# Altium PCB PCB1.PcbDoc
Units mil, origin at the board's own origin, x right, y up, seen from the top; angles counter-clockwise.
Board outline 8335 x 5613.82 mil, 2 copper layers (Top Layer, Bottom Layer); 104 components, 11 nets, 284 pads, 0 vias.
Unrouted connection lines stored in the file: 1.
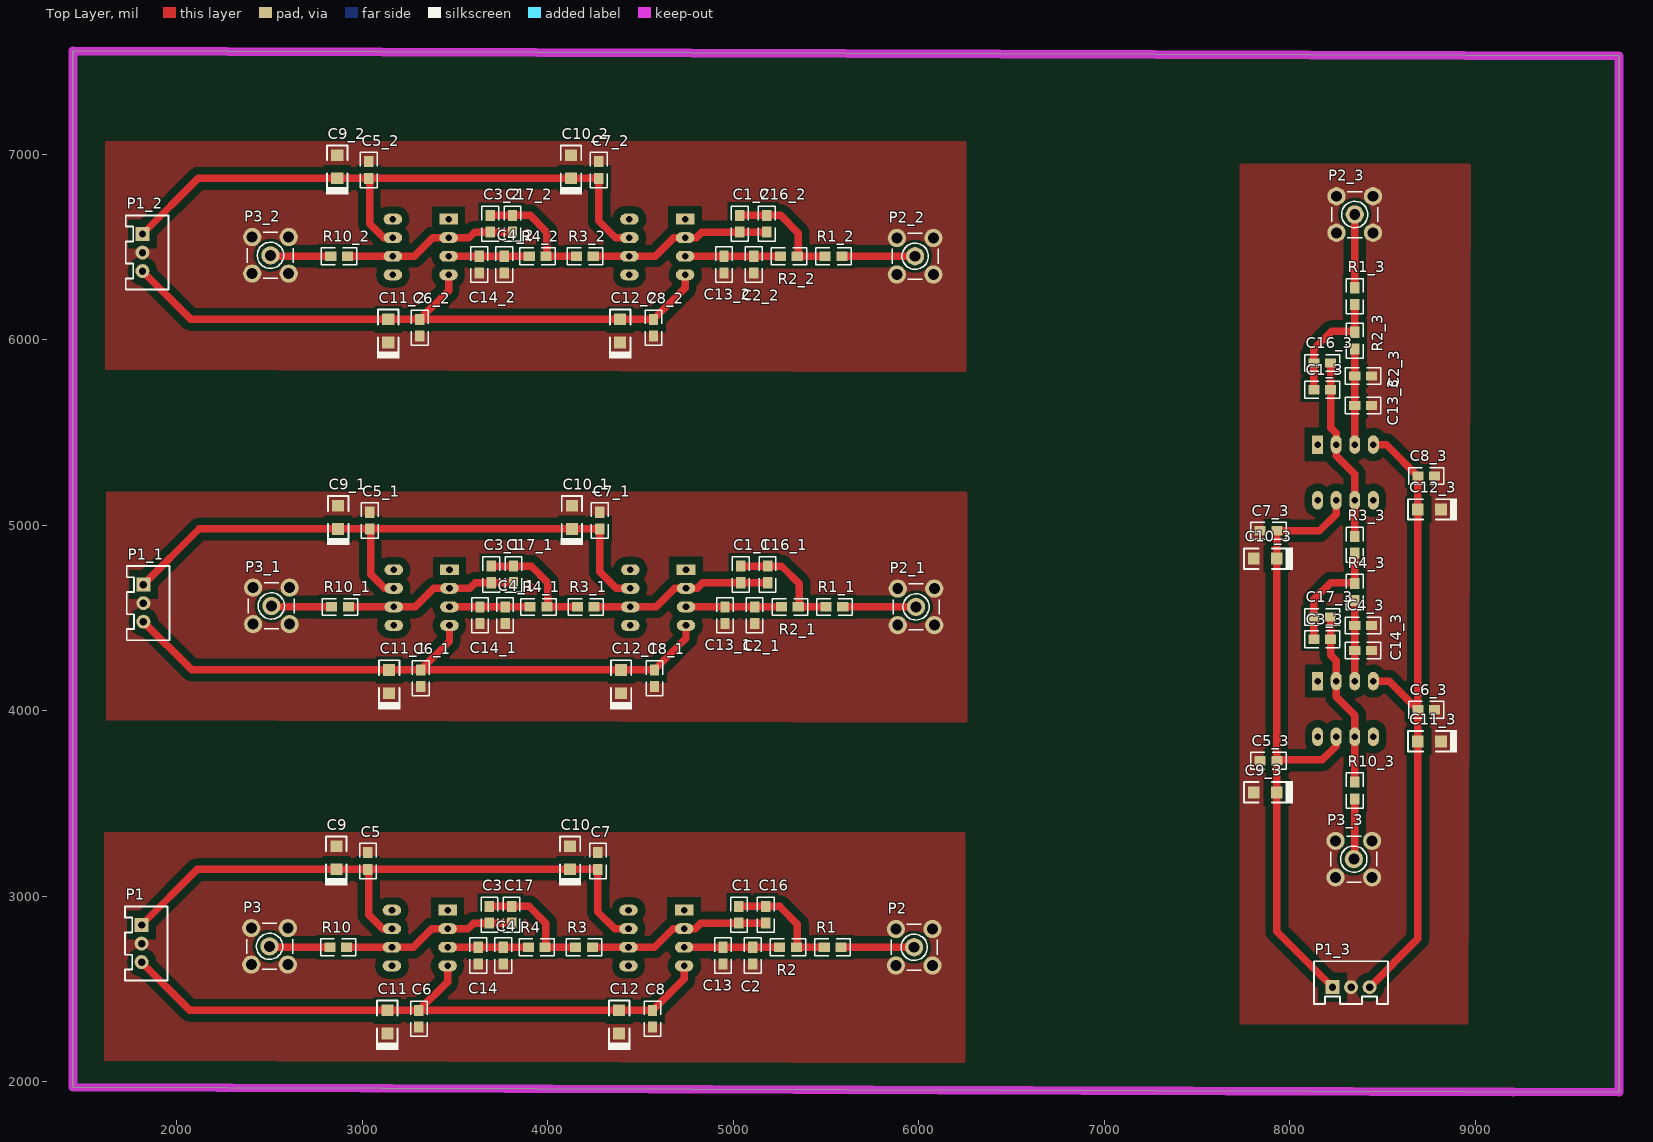
[diagram p0: Top Layer view]
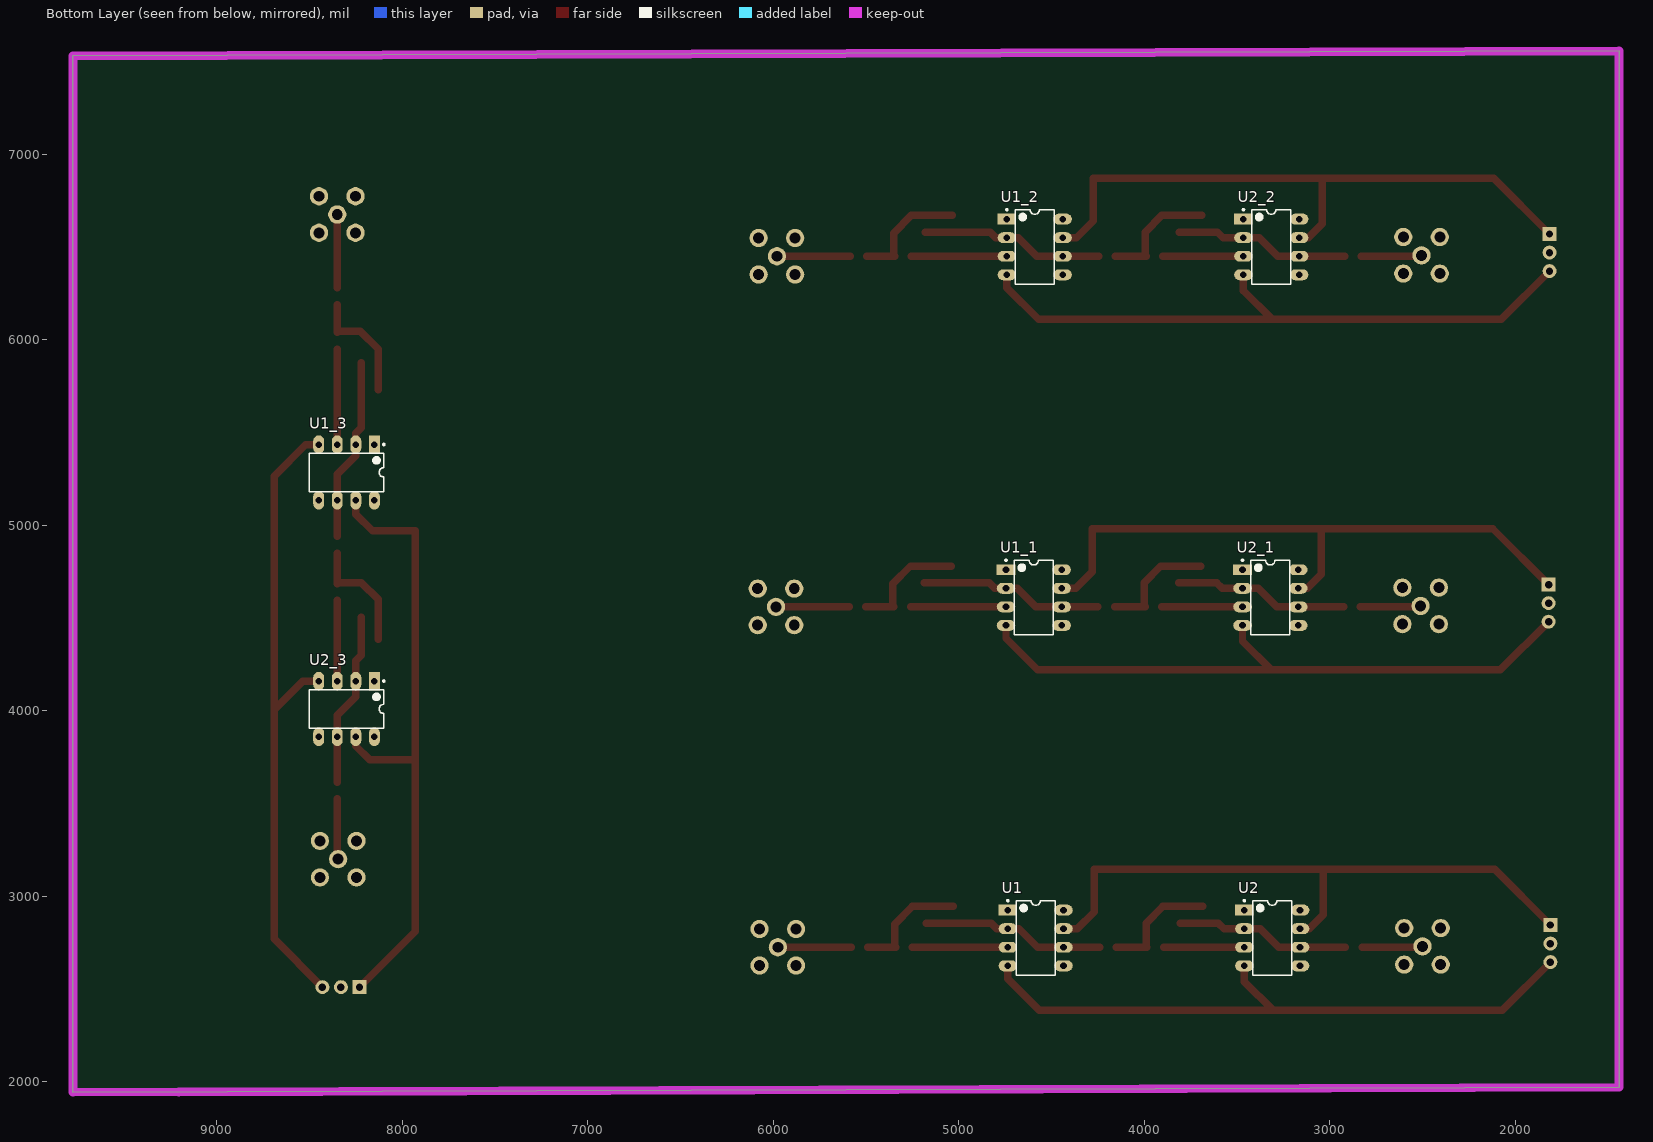
[diagram p1: Bottom Layer view, seen from below]

## Layer stack, top to bottom
Top Solder: solder mask 0.4, Solder Resist, Dk 3.5
Top Layer: signal copper 1.4
Dielectric 1: dielectric 12.6, FR-4, Dk 4.8
Bottom Layer: signal copper 1.4
Bottom Solder: solder mask 0.4, Solder Resist, Dk 3.5

## Board outline
1440,1970 1440,7556.99 9775,7530.15 9775,1943.16

## Design rules (kind name [scope] priority, off if disabled: settings)
Clearance [All] p1: gap=10 except(40: Arc-Fill Arc-Poly Track-Fill Track-Poly SMDPad-Fill SMDPad-Poly THPad-Fill THPad-Poly Via-Fill Via-Poly Fill-Fill Fill-Poly Poly-Poly)
PlaneConnect [All] p1: planeconnectstyle=Direct reliefexpansion=20 reliefentries=4 reliefconductorwidth=10 reliefairgap=10
PolygonConnect [All] p1: connectstyle=Direct reliefconductorwidth=10 reliefentries=4 polygonreliefangle="90 Angle" airgapwidth=10
RoutingVias [All] p1: holewidth=28 width=50 viastyle="Through Hole" minholewidth=28 minwidth=50 maxholewidth=28 maxwidth=50
SolderMaskExpansion [All] p1: expansion=4
Width [All] p1: maxlimit=100 minlimit=10 preferedwidth=10
29 further rules are at their usual default settings.

## Components (designator, comment, footprint, x,y, rotation, side; value= is the part's Value field where it differs from the comment)
C1 "0.1uf" 0805 5030,2855 r90 top
C1_1 "0.1uf" 0805 5040,4690 r90 top (schematic designator C1)
C1_2 "0.1uf" 0805 5035,6580 r90 top (schematic designator C1)
C1_3 "0.1uf" 0805 8220,5730 r180 top (schematic designator C1)
C2 "0.1uf" 0805 5105,2725 r270 top
C2_1 "0.1uf" 0805 5115,4560 r270 top (schematic designator C2)
C2_2 "0.1uf" 0805 5110,6450 r270 top (schematic designator C2)
C2_3 "0.1uf" 0805 8350,5805 r0 top (schematic designator C2)
C3 "0.1uf" 0805 3685,2945 r270 top
C3_1 "0.1uf" 0805 3695,4780 r270 top (schematic designator C3)
C3_2 "0.1uf" 0805 3690,6670 r270 top (schematic designator C3)
C3_3 "0.1uf" 0805 8130,4385 r0 top (schematic designator C3)
C4 "0.1uf" 0805 3760,2635 r90 top
C4_1 "0.1uf" 0805 3770,4470 r90 top (schematic designator C4)
C4_2 "0.1uf" 0805 3765,6360 r90 top (schematic designator C4)
C4_3 "0.1uf" 0805 8440,4460 r180 top (schematic designator C4)
C5 "0.1uf" 0805 3030,3145 r90 top
C5_1 "0.1uf" 0805 3040,4980 r90 top (schematic designator C5)
C5_2 "0.1uf" 0805 3035,6870 r90 top (schematic designator C5)
C5_3 "0.1uf" 0805 7930,3730 r180 top (schematic designator C5)
C6 "0.1uf" 0805 3305,2385 r270 top
C6_1 "0.1uf" 0805 3315,4220 r270 top (schematic designator C6)
C6_2 "0.1uf" 0805 3310,6110 r270 top (schematic designator C6)
C6_3 "0.1uf" 0805 8690,4005 r0 top (schematic designator C6)
C7 "0.1uf" 0805 4270,3145 r90 top
C7_1 "0.1uf" 0805 4280,4980 r90 top (schematic designator C7)
C7_2 "0.1uf" 0805 4275,6870 r90 top (schematic designator C7)
C7_3 "0.1uf" 0805 7930,4970 r180 top (schematic designator C7)
C8 "0.1uf" 0805 4565,2385 r270 top
C8_1 "0.1uf" 0805 4575,4220 r270 top (schematic designator C8)
C8_2 "0.1uf" 0805 4570,6110 r270 top (schematic designator C8)
C8_3 "0.1uf" 0805 8690,5265 r0 top (schematic designator C8)
C9 "Cap" 3216C-TYPE_A 2860,3145 r270 top
C9_1 "Cap" 3216C-TYPE_A 2870,4980 r270 top (schematic designator C9)
C9_2 "Cap" 3216C-TYPE_A 2865,6870 r270 top (schematic designator C9)
C9_3 "Cap" 3216C-TYPE_A 7930,3560 r0 top (schematic designator C9)
C10 "Cap" 3216C-TYPE_A 4120,3145 r270 top
C10_1 "Cap" 3216C-TYPE_A 4130,4980 r270 top (schematic designator C10)
C10_2 "Cap" 3216C-TYPE_A 4125,6870 r270 top (schematic designator C10)
C10_3 "Cap" 3216C-TYPE_A 7930,4820 r0 top (schematic designator C10)
C11 "Cap" 3216C-TYPE_A 3135,2260 r270 top
C11_1 "Cap" 3216C-TYPE_A 3145,4095 r270 top (schematic designator C11)
C11_2 "Cap" 3216C-TYPE_A 3140,5985 r270 top (schematic designator C11)
C11_3 "Cap" 3216C-TYPE_A 8815,3835 r0 top (schematic designator C11)
C12 "Cap" 3216C-TYPE_A 4385,2260 r270 top
C12_1 "Cap" 3216C-TYPE_A 4395,4095 r270 top (schematic designator C12)
C12_2 "Cap" 3216C-TYPE_A 4390,5985 r270 top (schematic designator C12)
C12_3 "Cap" 3216C-TYPE_A 8815,5085 r0 top (schematic designator C12)
C13 "0.1uf" 0805 4945,2635 r90 top
C13_1 "0.1uf" 0805 4955,4470 r90 top (schematic designator C13)
C13_2 "0.1uf" 0805 4950,6360 r90 top (schematic designator C13)
C13_3 "0.1uf" 0805 8440,5645 r180 top (schematic designator C13)
C14 "0.1uf" 0805 3625,2635 r90 top
C14_1 "0.1uf" 0805 3635,4470 r90 top (schematic designator C14)
C14_2 "0.1uf" 0805 3630,6360 r90 top (schematic designator C14)
C14_3 "0.1uf" 0805 8440,4325 r180 top (schematic designator C14)
C16 "0.1uf" 0805 5175,2855 r90 top
C16_1 "0.1uf" 0805 5185,4690 r90 top (schematic designator C16)
C16_2 "0.1uf" 0805 5180,6580 r90 top (schematic designator C16)
C16_3 "0.1uf" 0805 8220,5875 r180 top (schematic designator C16)
C17 "0.1uf" 0805 3805,2855 r90 top
C17_1 "0.1uf" 0805 3815,4690 r90 top (schematic designator C17)
C17_2 "0.1uf" 0805 3810,6580 r90 top (schematic designator C17)
C17_3 "0.1uf" 0805 8220,4505 r180 top (schematic designator C17)
P1 "XH2.54-3p" XH2.54-3p 1810,2845 r270 top
P1_1 "XH2.54-3p" XH2.54-3p 1820,4680 r270 top (schematic designator P1)
P1_2 "XH2.54-3p" XH2.54-3p 1815,6570 r270 top (schematic designator P1)
P1_3 "XH2.54-3p" XH2.54-3p 8230,2510 r0 top (schematic designator P1)
P2 "SMB" SMB_V-RJ45 5975,2725 r0 top
P2_1 "SMB" SMB_V-RJ45 5985,4560 r0 top (schematic designator P2)
P2_2 "SMB" SMB_V-RJ45 5980,6450 r0 top (schematic designator P2)
P2_3 "SMB" SMB_V-RJ45 8350,6675 r90 top (schematic designator P2)
P3 "SMB" SMB_V-RJ45 2500,2730 r0 top
P3_1 "SMB" SMB_V-RJ45 2510,4565 r0 top (schematic designator P3)
P3_2 "SMB" SMB_V-RJ45 2505,6455 r0 top (schematic designator P3)
P3_3 "SMB" SMB_V-RJ45 8345,3200 r90 top (schematic designator P3)
R1 "0" 0805 5580,2725 r180 top
R1_1 "0" 0805 5590,4560 r180 top (schematic designator R1)
R1_2 "0" 0805 5585,6450 r180 top (schematic designator R1)
R1_3 "0" 0805 8350,6280 r270 top (schematic designator R1)
R2 "0" 0805 5340,2725 r180 top
R2_1 "0" 0805 5350,4560 r180 top (schematic designator R2)
R2_2 "0" 0805 5345,6450 r180 top (schematic designator R2)
R2_3 "0" 0805 8350,6040 r270 top (schematic designator R2)
R3 "0" 0805 4240,2725 r180 top
R3_1 "0" 0805 4250,4560 r180 top (schematic designator R3)
R3_2 "0" 0805 4245,6450 r180 top (schematic designator R3)
R3_3 "0" 0805 8350,4940 r270 top (schematic designator R3)
R4 "0" 0805 3985,2725 r180 top
R4_1 "0" 0805 3995,4560 r180 top (schematic designator R4)
R4_2 "0" 0805 3990,6450 r180 top (schematic designator R4)
R4_3 "0" 0805 8350,4685 r270 top (schematic designator R4)
R10 "0" 0805 2915,2725 r180 top
R10_1 "0" 0805 2925,4560 r180 top (schematic designator R10)
R10_2 "0" 0805 2920,6450 r180 top (schematic designator R10)
R10_3 "0" 0805 8350,3615 r270 top (schematic designator R10)
U1 "OP07" TI-JG8 4585,2775 r180 bottom
U1_1 "OP07" TI-JG8 4595,4610 r180 bottom (schematic designator U1)
U1_2 "OP07" TI-JG8 4590,6500 r180 bottom (schematic designator U1)
U1_3 "OP07" TI-JG8 8300,5285 r270 bottom (schematic designator U1)
U2 "OP07" TI-JG8 3310,2775 r180 bottom
U2_1 "OP07" TI-JG8 3320,4610 r180 bottom (schematic designator U2)
U2_2 "OP07" TI-JG8 3315,6500 r180 bottom (schematic designator U2)
U2_3 "OP07" TI-JG8 8300,4010 r270 bottom (schematic designator U2)

## Footprints (in the part's own frame and the unit in brackets; to place one, negate y for a bottom-side part, rotate by r counter-clockwise, add the part's x,y. Pads: shape width x height; smd on the part's side, far side on the other; paste and mask are expansions set on the pad)
0805 [mil]
  rect 60x50 smd: 1(0,0) 2(90,0)
  silkscreen extent -50,-45 140,45
3216C-TYPE_A [mm]
  rect 1.6x1.65 smd: 1(0,0) 2(-3.175,0)
  silkscreen extent -4.51,-1.54 2.22,1.52
SMB_V-RJ45 [mm] "Connector; SMB Straight"
  round 2.5 hole 1.5: 1(0,0) 2(-2.5,-2.5) 2(-2.5,2.5) 2(2.5,-2.5) 2(2.5,2.5)
  silkscreen extent -3.15,-3.15 3.15,3.15
TI-JG8 [mm] "DIP, 8-Leads, Body 10.15x7.1mm, Pitch 2.54mm"
  rect 2.54x1.5 hole 0.9: 1(-3.81,3.81)
  oval 2.54x1.5 hole 0.9: 2(-3.81,1.27) 3(-3.81,-1.27) 4(-3.81,-3.81) 5(3.81,-3.81) 6(3.81,-1.27) 7(3.81,1.27) 8(3.81,3.81)
  silkscreen extent -3.94,-5.1 2.65,5.23, body extent -3.95,-5.07 3.95,5.07, height 5.08
XH2.54-3p [mil]
  rect 75x75 hole 40: 1(0,0)
  round 75 hole 40: 2(100,0) 3(200,0)
  silkscreen extent -100,-90 300,140

## Part data
C1 C1_1 C1_2 C1_3 C2 C2_1 C2_2 C2_3 C3 C3_1 C3_2 C3_3 C4 C4_1 C4_2 C4_3: library part cap
C5 C5_1 C5_2 C5_3 C6 C6_1 C6_2 C6_3 C7 C7_1 C7_2 C7_3 C8 C8_1 C8_2 C8_3 C13 C13_1 C13_2 C13_3 C14 C14_1 C14_2 C14_3 C16 C16_1 C16_2 C16_3 C17 C17_1 C17_2 C17_3: library part Cap
C9 C9_1 C9_2 C9_3 C10 C10_1 C10_2 C10_3 C11 C11_1 C11_2 C11_3 C12 C12_1 C12_2 C12_3: library part "Tantalium Cap"
P2 P2_1 P2_2 P2_3 P3 P3_1 P3_2 P3_3: "SMB Straight Connector"
R1 R1_1 R1_2 R1_3 R2 R2_1 R2_2 R2_3 R3 R3_1 R3_2 R3_3 R4 R4_1 R4_2 R4_3 R10 R10_1 R10_2 R10_3: library part Res

## Nets (pads, with @x,y where several pads share a name; then routed paths per layer and width w, separated by ;. In a path a pad name is that pad's centre, name@x,y a point inside that pad or via, vN(x,y) a via of type N, cw(c..) or ccw(c..) an arc to the next point about the centre after c; other vN are vias at no path point)
5V: C5.1 C7.1 C9.1 C10.1 P1.1 U1.7 U2.7 | length 3412.6
  Top Layer w40: P1.1 2110,3145 C9.1 C5.1 ; U2.7 3110,2825 3035,2900 3035,3145 C10.1 C7.1 4270,2915 4360,2825 U1.7
-5V: C6.1 C8.1 C11.2 C12.2 P1.3 U1.4 U2.4 | length 3477.3
  Top Layer w40: P1.3 2070,2385 C11.2 C6.1 ; U2.4 3460,2540 C6.1 ; U1.4 4735,2555 C8.1 C12.2 C6.1
GND: C2.2 C4.1 C5.2 C6.2 C7.2 C8.2 C9.2 C10.2 C11.1 C12.1 C13.1 C14.1 P1.2 P2.2 P3.2
NetC1_1: C1.1 C16.1 R3.1 U1.2 U1.6 | length 988.8
  Top Layer w40: R3.1 U1.6 4575,2725 4675,2825 U1.2 4795,2825 4825,2855 C1.1 C16.1
NetC1_2: C1.2 C16.2 R1.2 R2.1 | length 631.4
  Top Layer w40: C1.2 C16.2 5250,2945 5345,2850 5345,2730 R2.1 R1.2
NetC2_1: C2.1 C13.2 R2.2 U1.3 | length 515
  Top Layer w40: U1.3 C13.2 C2.1 R2.2
NetC3_1: C3.1 C17.2 R3.2 R4.1 | length 639.4
  Top Layer w40: C3.1 C17.2 3900,2945 3990,2855 3990,2730 R4.1 R3.2
NetC3_2: C3.2 C17.1 R10.1 U2.2 U2.6 | length 943.8
  Top Layer w40: R10.1 U2.6 3275,2725 3375,2825 U2.2 3570,2825 3600,2855 C3.2 C17.1
NetC4_2: C4.2 C14.2 R4.2 U2.3 | length 435
  Top Layer w40: U2.3 C14.2 C4.2 R4.2
NetP2_1: P2.1 R1.1 | length 395
  Top Layer w40: R1.1 P2.1
NetP3_1: P3.1 R10.2 | length 327.1
  Top Layer w40: P3.1 2505,2725 R10.2
pads on no net: C1_1.1 C1_1.2 C1_2.1 C1_2.2 C1_3.1 C1_3.2 C2_1.1 C2_1.2 C2_2.1 C2_2.2 C2_3.1 C2_3.2 C3_1.1 C3_1.2 C3_2.1 C3_2.2 C3_3.1 C3_3.2 C4_1.1 C4_1.2 C4_2.1 C4_2.2 C4_3.1 C4_3.2 C5_1.1 C5_1.2 C5_2.1 C5_2.2 C5_3.1 C5_3.2 C6_1.1 C6_1.2 C6_2.1 C6_2.2 C6_3.1 C6_3.2 C7_1.1 C7_1.2 C7_2.1 C7_2.2 C7_3.1 C7_3.2 C8_1.1 C8_1.2 C8_2.1 C8_2.2 C8_3.1 C8_3.2 C9_1.1 C9_1.2 C9_2.1 C9_2.2 C9_3.1 C9_3.2 C10_1.1 C10_1.2 C10_2.1 C10_2.2 C10_3.1 C10_3.2 C11_1.1 C11_1.2 C11_2.1 C11_2.2 C11_3.1 C11_3.2 C12_1.1 C12_1.2 C12_2.1 C12_2.2 C12_3.1 C12_3.2 C13_1.1 C13_1.2 C13_2.1 C13_2.2 C13_3.1 C13_3.2 C14_1.1 C14_1.2 C14_2.1 C14_2.2 C14_3.1 C14_3.2 C16_1.1 C16_1.2 C16_2.1 C16_2.2 C16_3.1 C16_3.2 C17_1.1 C17_1.2 C17_2.1 C17_2.2 C17_3.1 C17_3.2 P1_1.1 P1_1.2 P1_1.3 P1_2.1 P1_2.2 P1_2.3 P1_3.1 P1_3.2 P1_3.3 P2_1.1 P2_1.2 P2_2.1 P2_2.2 P2_3.1 P2_3.2 P3_1.1 P3_1.2 P3_2.1 P3_2.2 P3_3.1 P3_3.2 R1_1.1 R1_1.2 R1_2.1 R1_2.2 R1_3.1 R1_3.2 R2_1.1 R2_1.2 R2_2.1 R2_2.2 R2_3.1 R2_3.2 R3_1.1 R3_1.2 R3_2.1 R3_2.2 R3_3.1 R3_3.2 R4_1.1 R4_1.2 R4_2.1 R4_2.2 R4_3.1 R4_3.2 R10_1.1 R10_1.2 R10_2.1 R10_2.2 R10_3.1 R10_3.2 U1.1 U1.5 U1.8 U1_1.1 U1_1.2 U1_1.3 U1_1.4 U1_1.5 U1_1.6 U1_1.7 U1_1.8 U1_2.1 U1_2.2 U1_2.3 U1_2.4 U1_2.5 U1_2.6 U1_2.7 U1_2.8 U1_3.1 U1_3.2 U1_3.3 U1_3.4 U1_3.5 U1_3.6 U1_3.7 U1_3.8 U2.1 U2.5 U2.8 U2_1.1 U2_1.2 U2_1.3 U2_1.4 U2_1.5 U2_1.6 U2_1.7 U2_1.8 U2_2.1 U2_2.2 U2_2.3 U2_2.4 U2_2.5 U2_2.6 U2_2.7 U2_2.8 U2_3.1 U2_3.2 U2_3.3 U2_3.4 U2_3.5 U2_3.6 U2_3.7 U2_3.8
copper on no net: | length 35296.4
  Top Layer w40: 1815,6370 2075,6110 3140,6110 3310,6110 ; 1815,6570 2115,6870 2865,6870 3035,6870 ; 1820,4480 2080,4220 3145,4220 3315,4220 ; 1820,4680 2120,4980 2870,4980 3040,4980 ; 2505,6455 2510,6450 2830,6450 ; 2510,4565 2515,4560 2835,4560 ; 2920,6450 3165,6450 3280,6450 3380,6550 3465,6550 3575,6550 3605,6580 3690,6580 3810,6580 ; 2925,4560 3170,4560 3285,4560 3385,4660 3470,4660 3580,4660 3610,4690 3695,4690 3815,4690 ; 3165,6550 3115,6550 3040,6625 3040,6870 4125,6870 4275,6870 4275,6640 4365,6550 4440,6550 ; 3170,4660 3120,4660 3045,4735 3045,4980 4130,4980 4280,4980 4280,4750 4370,4660 4445,4660 ; 3465,6350 3465,6265 3310,6110 ; 3465,6450 3630,6450 3765,6450 3900,6450 ; 3470,4460 3470,4375 3315,4220 ; 3470,4560 3635,4560 3770,4560 3905,4560 ; 3690,6670 3810,6670 3905,6670 3995,6580 3995,6455 3990,6450 4155,6450 ; 3695,4780 3815,4780 3910,4780 4000,4690 4000,4565 3995,4560 4160,4560 ; 4245,6450 4440,6450 4580,6450 4680,6550 4740,6550 4800,6550 4830,6580 5035,6580 5180,6580 ; 4250,4560 4445,4560 4585,4560 4685,4660 4745,4660 4805,4660 4835,4690 5040,4690 5185,4690 ; 4740,6350 4740,6280 4570,6110 4390,6110 3310,6110 ; 4740,6450 4950,6450 5110,6450 5255,6450 ; 4745,4460 4745,4390 4575,4220 4395,4220 3315,4220 ; 4745,4560 4955,4560 5115,4560 5260,4560 ; 5035,6670 5180,6670 5255,6670 5350,6575 5350,6455 5345,6450 5495,6450 ; 5040,4780 5185,4780 5260,4780 5355,4685 5355,4565 5350,4560 5500,4560 ; 5585,6450 5980,6450 ; 5590,4560 5985,4560 ; 7930,3730 7930,3560 7930,2810 8230,2510 ; 8130,4385 8130,4505 8130,4600 8220,4690 8345,4690 8350,4685 8350,4850 ; 8130,5730 8130,5875 8130,5950 8225,6045 8345,6045 8350,6040 8350,6190 ; 8220,4505 8220,4385 8220,4300 8250,4270 8250,4160 8250,4075 8350,3975 8350,3860 8350,3615 ; 8220,5875 8220,5730 8220,5525 8250,5495 8250,5435 8250,5375 8350,5275 8350,5135 8350,4940 ; 8250,3860 8250,3810 8175,3735 7930,3735 7930,4820 7930,4970 8160,4970 8250,5060 8250,5135 ; 8345,3200 8350,3205 8350,3525 ; 8350,4160 8350,4325 8350,4460 8350,4595 ; 8350,5435 8350,5645 8350,5805 8350,5950 ; 8350,6280 8350,6675 ; 8430,2510 8690,2770 8690,3835 8690,4005 ; 8450,4160 8535,4160 8690,4005 ; 8450,5435 8520,5435 8690,5265 8690,5085 8690,4005

## Polygon pours and split planes (outlines as drawn)
no net on Top Layer "Top Layer-No Net" (solid, pour order 14): 9025,2245 7730,2245 7730,6945 7735,6950 9040.15,6950
no net on Top Layer "Top Layer-No Net" (solid, pour order 12): 1550,5775 1550,7070 6250,7070 6255,7065 6255,5759.85
no net on Top Layer "Top Layer-No Net" (solid, pour order 10): 1555,3885 1555,5180 6255,5180 6260,5175 6260,3869.85
GND on Top Layer "Top Layer-No Net" (solid, pour order 8): 1545,2050 1545,3345 6245,3345 6250,3340 6250,2034.85

## Keep-outs
Keep-Out Layer:
  lines w47.24: 1440,5845 1440,1970 ; 9205,1945 1440,1970 ; 1440,1970 9775,1943.16 9775,7530.15 1440,7556.99 1440,1970